# Altium PCB 2015_CNC.PcbDoc
Units mil, origin at the board's own origin, x right, y up, seen from the top; angles counter-clockwise.
Board outline 2520 x 3950 mil, 4 copper layers (1-TOP, 2-SIGNAL, 3-GND, 4-BOT), stack 68 mil thick; 85 components, 74 nets, 344 pads, 102 vias.
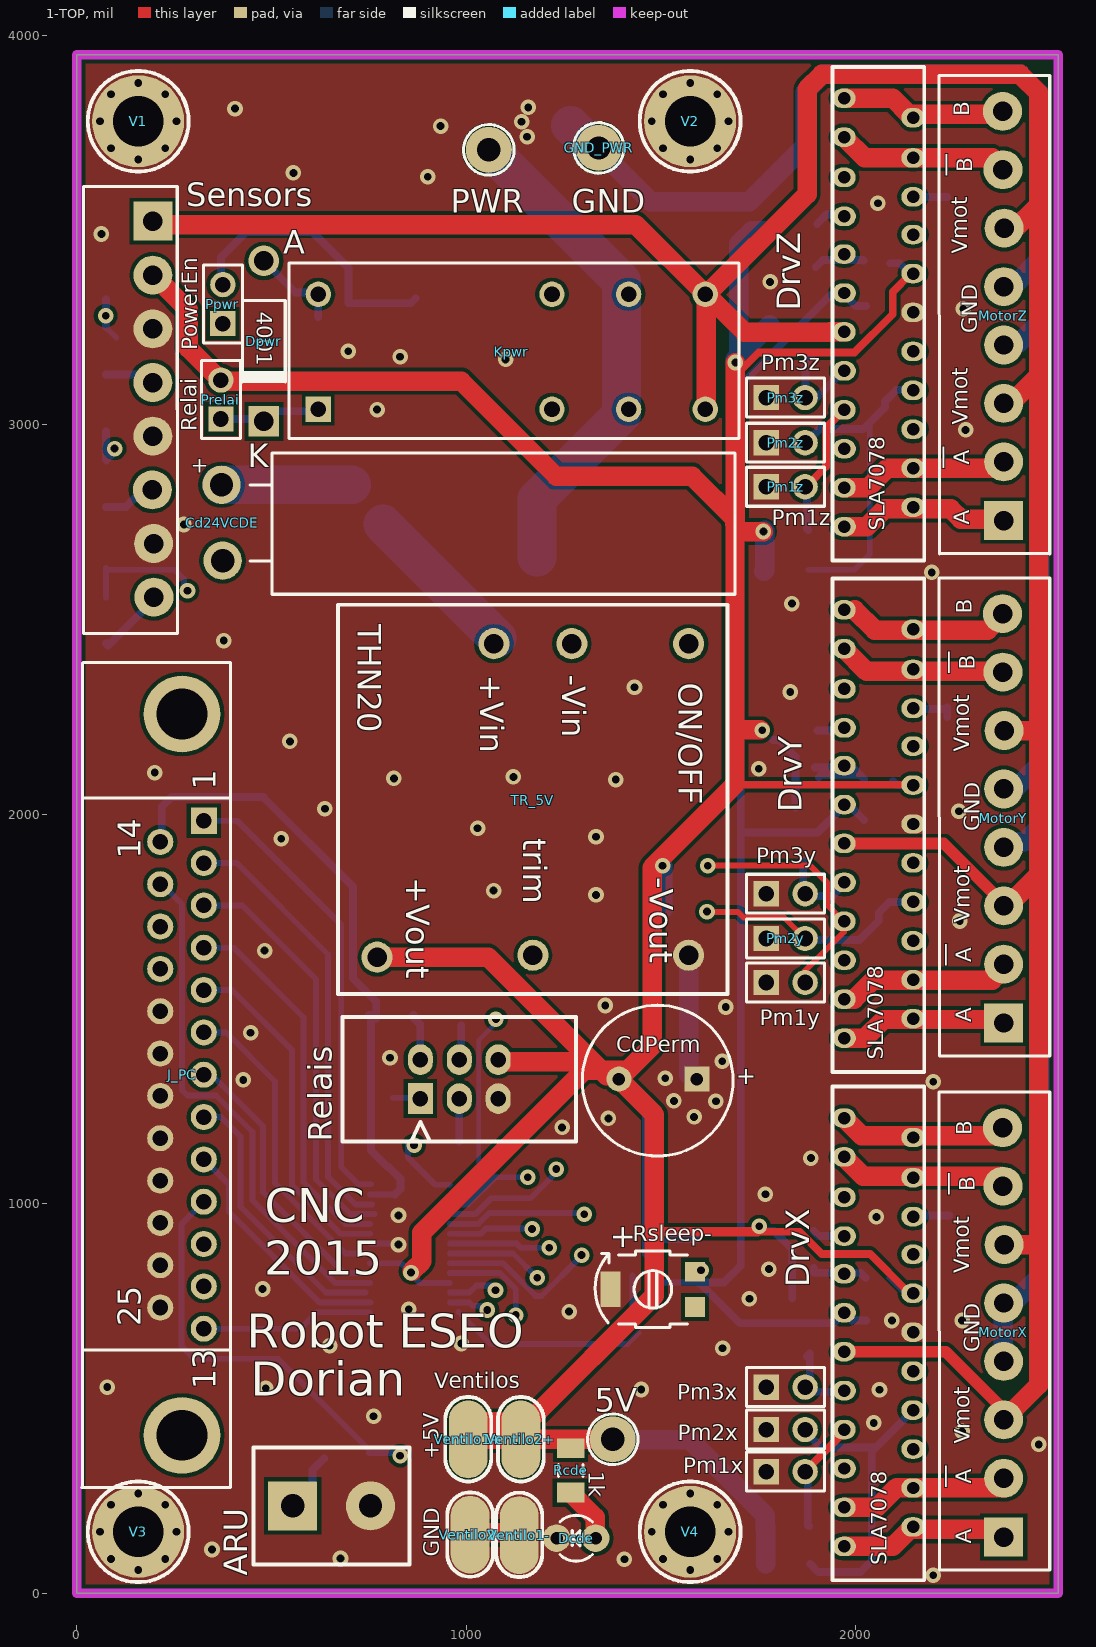
[diagram p0: 1-TOP view]
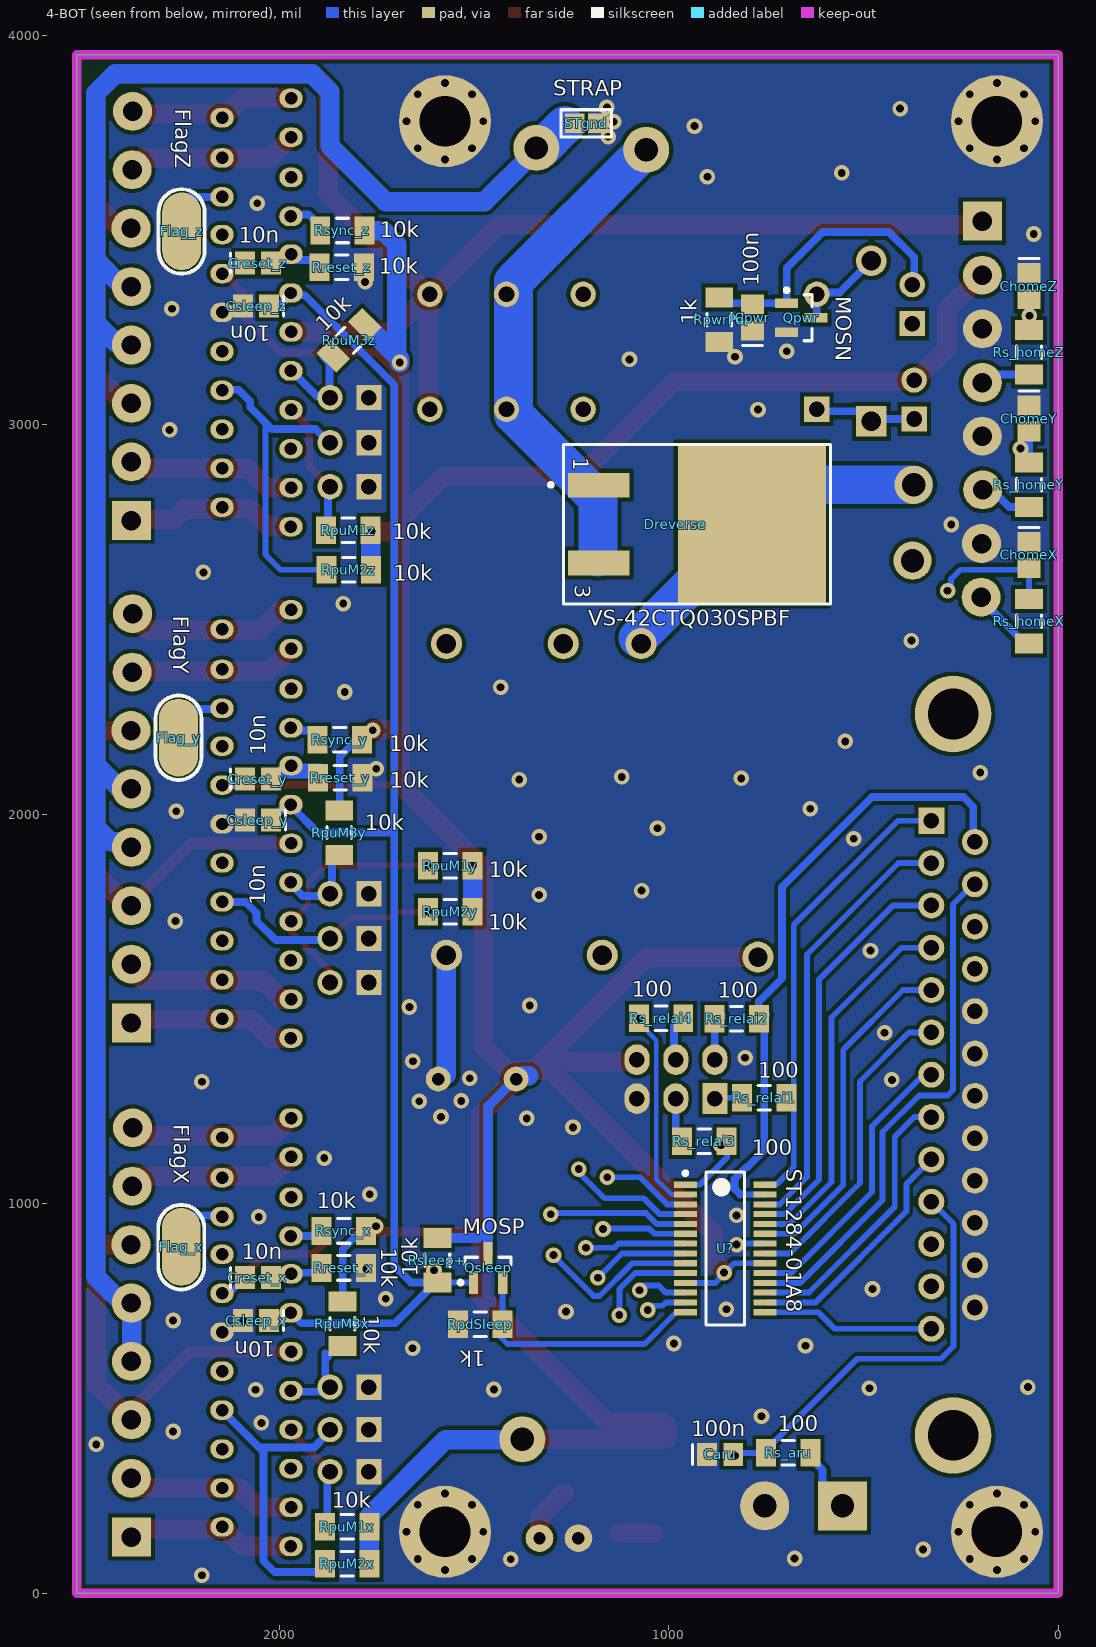
[diagram p1: 4-BOT view, seen from below]
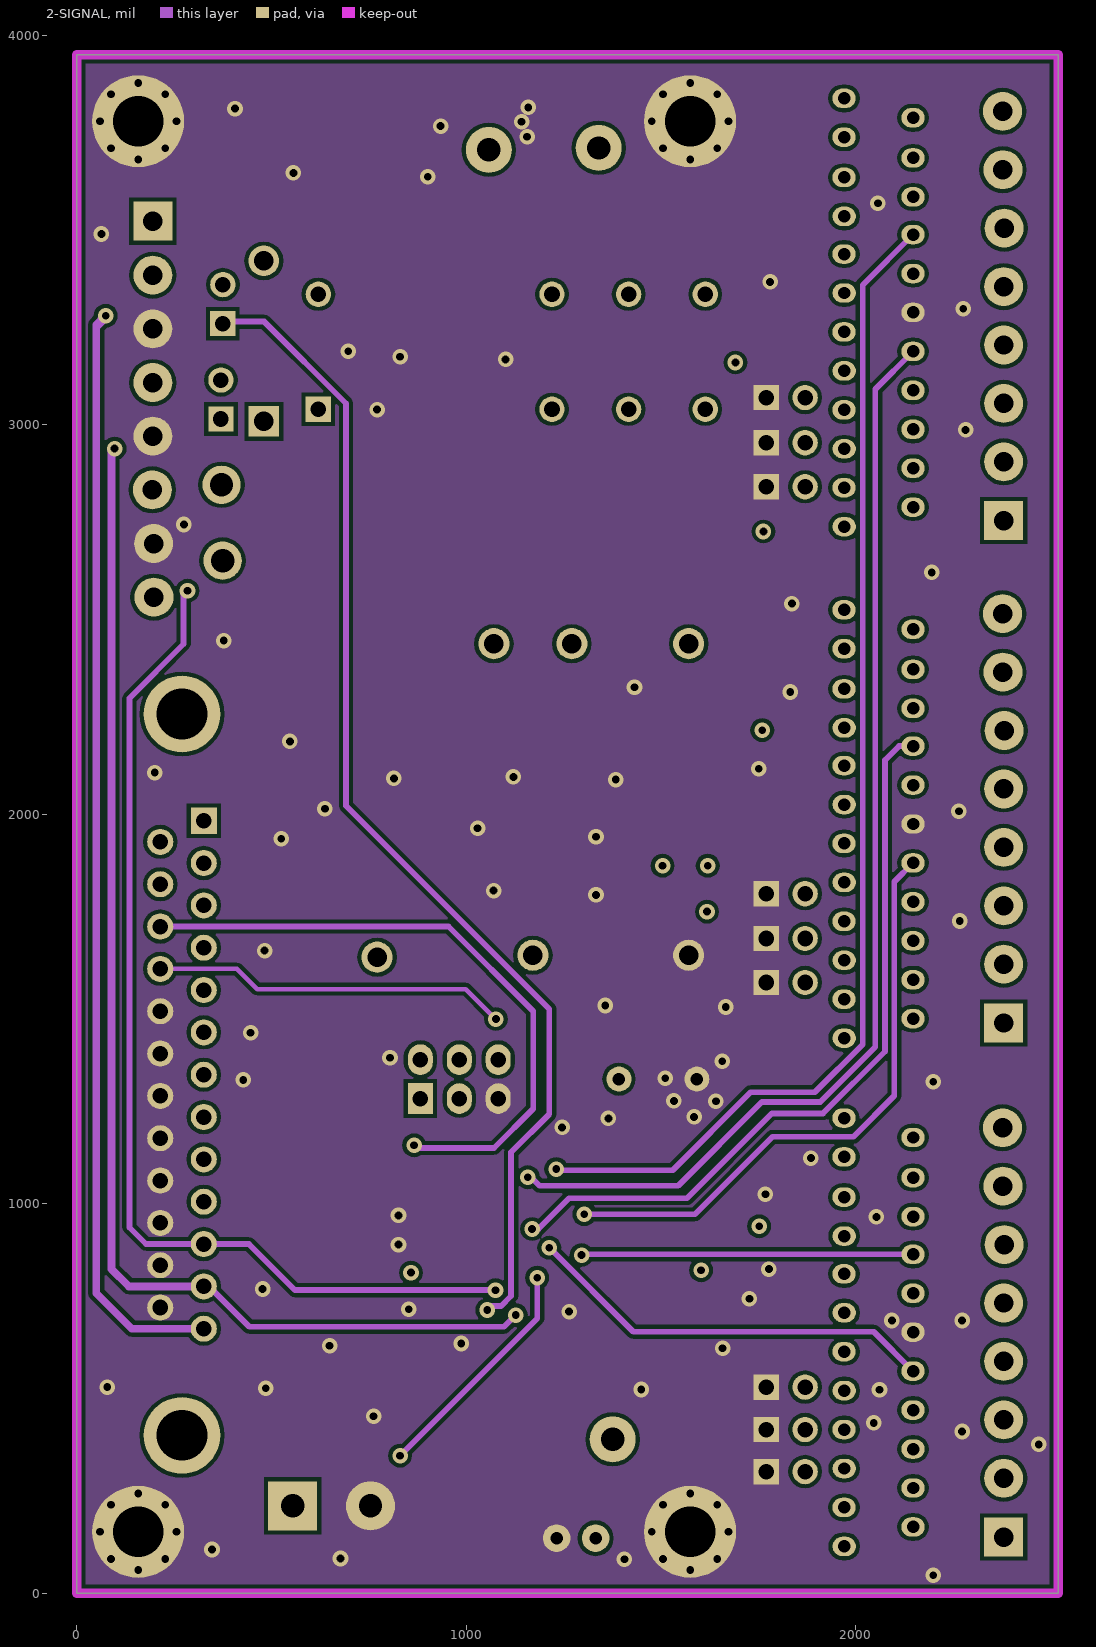
[diagram p2: 2-SIGNAL]
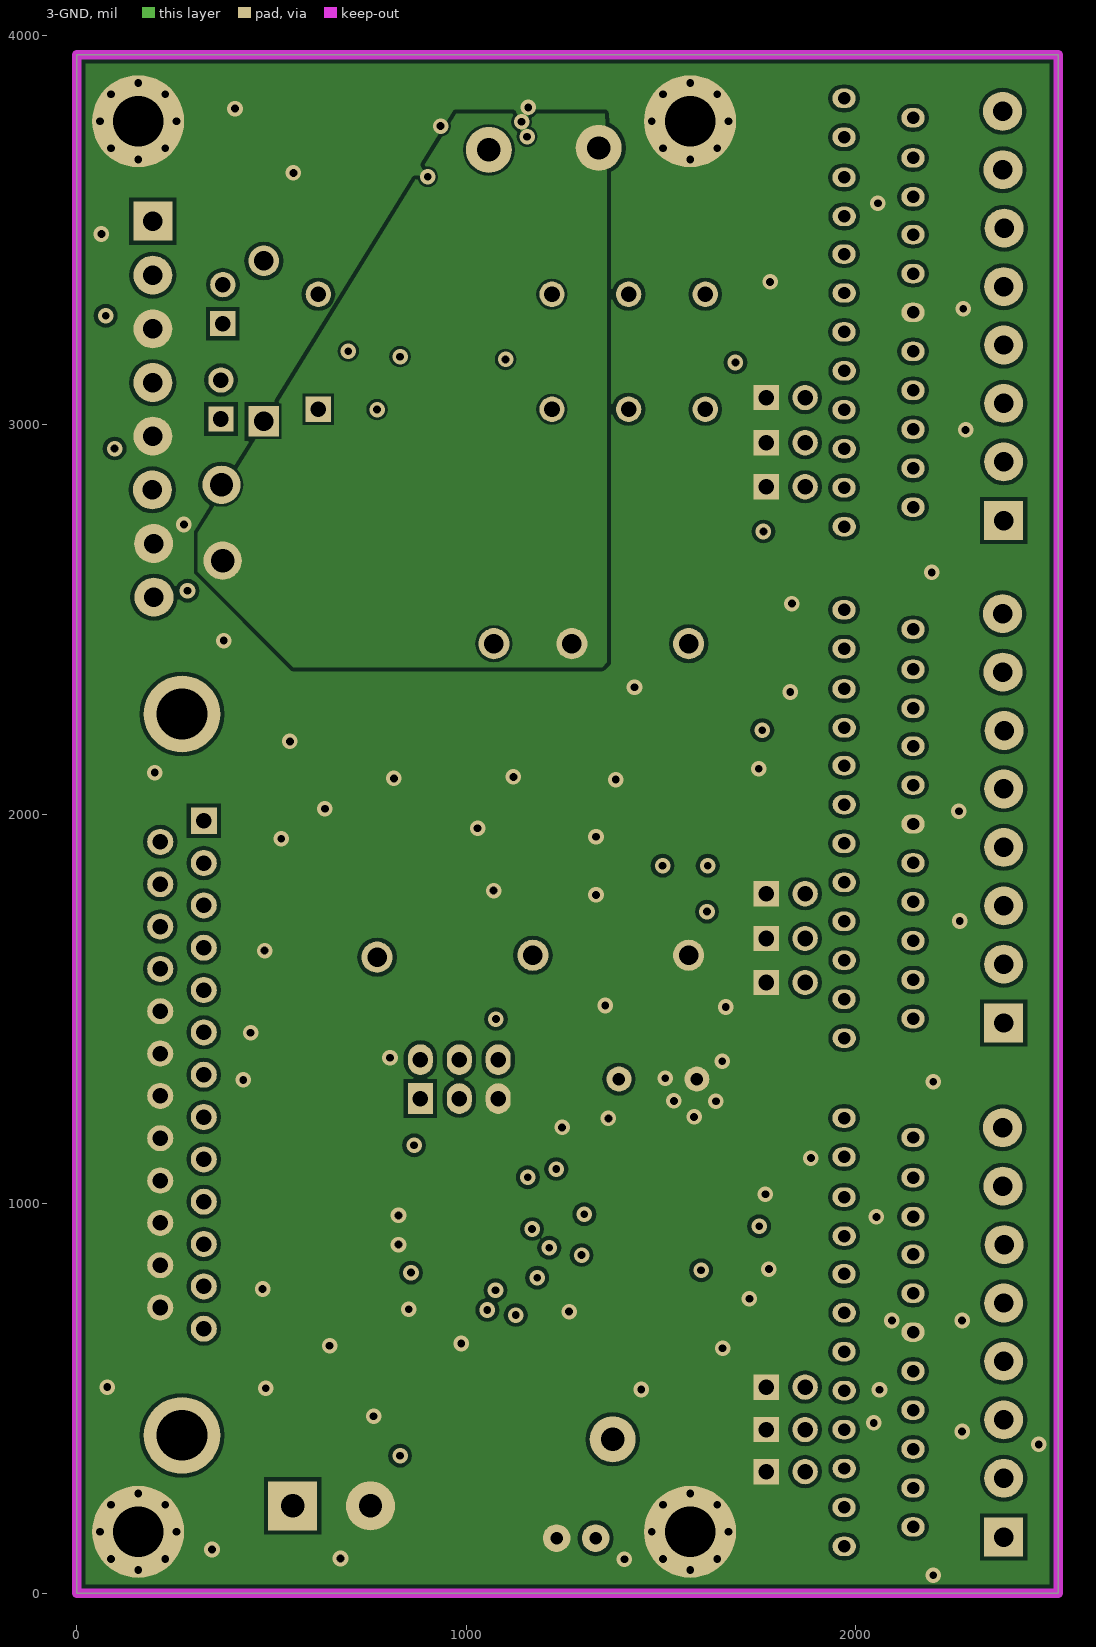
[diagram p3: 3-GND]
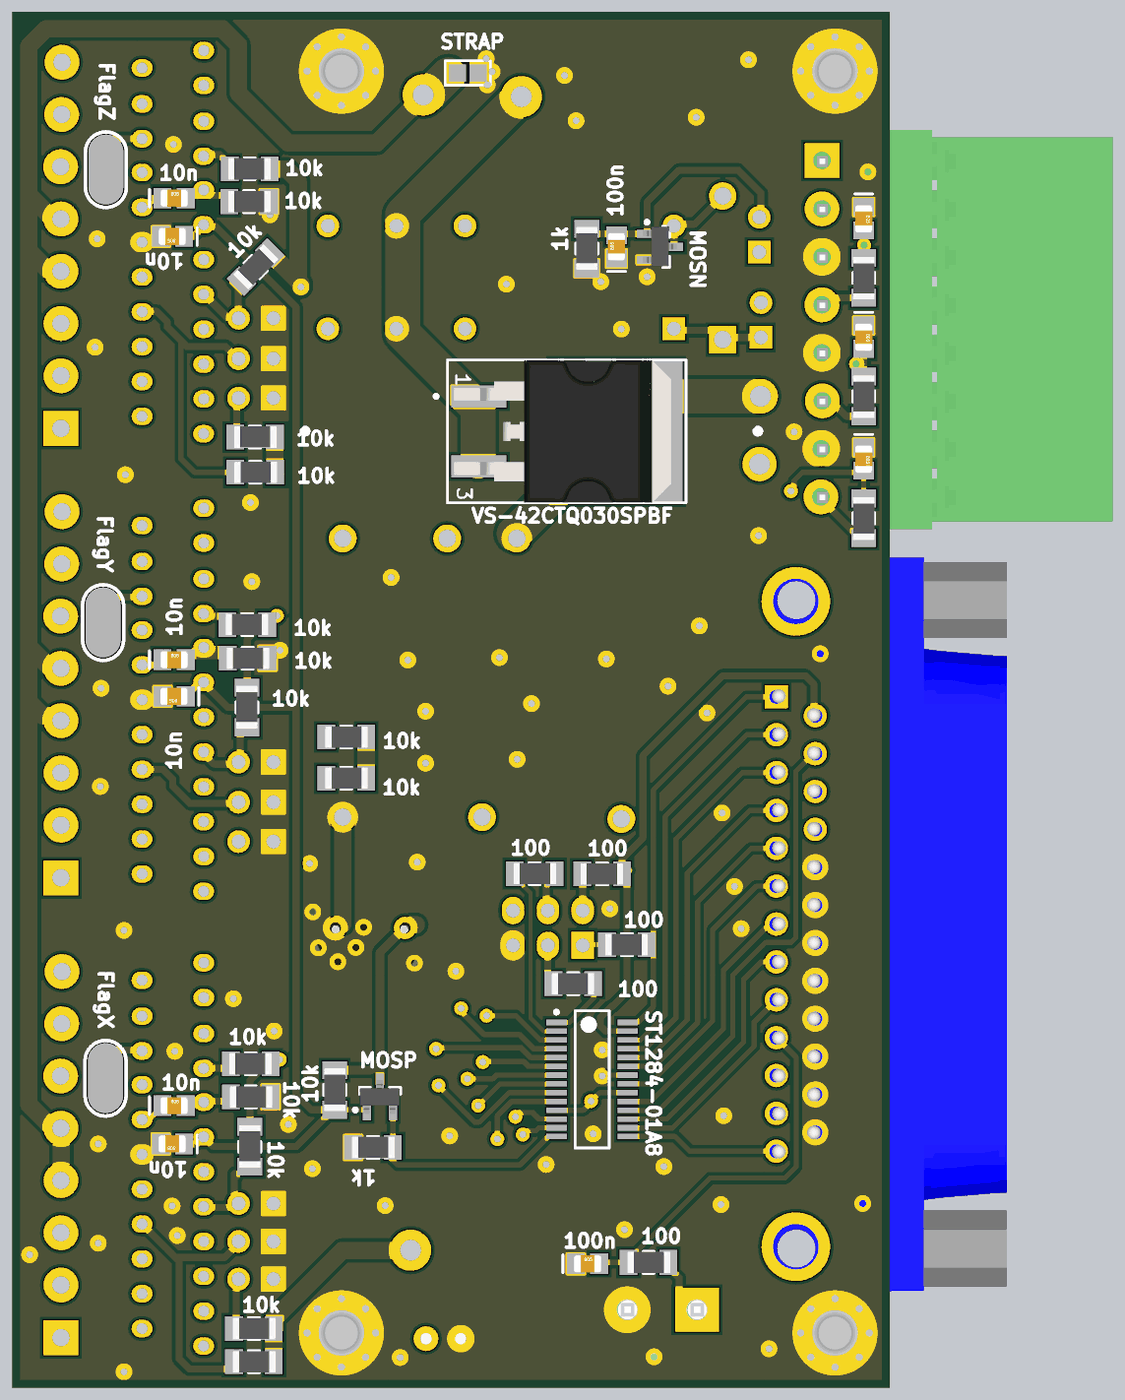
[diagram p4: 3D render of the assembled board from below, using the file's embedded part models]

## Layer stack, top to bottom
Top Solder: solder mask 0.4, Solder Resist, Dk 3.5
1-TOP: signal copper 1.4
Dielectric1: core 20.8, FR-4, Dk 4.8
2-SIGNAL: signal copper 1.4
Dielectric2: prepreg 20.8, FR-4, Dk 4.8
3-GND: signal copper 1.4
Dielectric3: core 20.8, FR-4, Dk 4.8
4-BOT: signal copper 1.4
Bottom Solder: solder mask 0.4, Solder Resist, Dk 3.5

## Board outline
0,0 0,3950 2520,3950 2520,0

## Design rules (kind name [scope] priority, off if disabled: settings)
Clearance Clearance_1 [InNamedPolygon('2-GND') Or  InNamedPolygon('3-GND') Or  InNamedPolygon('1-GND') Or  InNamedPolygon('4-GND')] p1: gap=10
Clearance [All] p2: gap=7
FabricationTestpoint [(IsPad And (OnTopLayer Or OnBottomLayer))] p1: side=3 testpointundercomponent=TRUE minsize=40 maxsize=100 preferedsize=60 minholesize=0 maxholesize=40 preferedholesize=32 testpointgrid=1 allowsidetop=TRUE allowsidebottom=TRUE usegrid=TRUE gridtolerance=0.01
HoleSize [All] p1: absolutevalues=TRUE maxlimit=200 minlimit=1 maxpercent=80.000 minpercent=20.000
PlaneConnect [All] p1: planeconnectstyle=Direct reliefexpansion=20 reliefentries=4 reliefconductorwidth=10 reliefairgap=10
PolygonConnect [All] p1: connectstyle=Direct reliefconductorwidth=10 reliefentries=4 polygonreliefangle="90 Angle" airgapwidth=10
RoomDefinition 2015_CNC [InComponentClass('2015_CNC')] p1: confinementstyle=ConfineIn formatcopy=TRUE lockcomponents=FALSE outline 6845,-1450 6315,-1450 6315,-900 6845,-900
RoutingVias [All] p1: holewidth=28 width=50 viastyle="Through Hole" minholewidth=28 minwidth=50 maxholewidth=28 maxwidth=50
SilkToSolderMaskClearance SilkscreenOverComponentPads [IsPad] p1: minsilkscreentomaskgap=10 clearancetoexposedcopper=TRUE
SolderMaskExpansion [All] p1: expansion=4
Width [All] p1: maxlimit=300 minlimit=10 preferedwidth=20
25 further rules are at their usual default settings.

## Components (designator, comment, footprint, x,y, rotation, side; value= is the part's Value field where it differs from the comment)
5V "Name" "Point Test_D3_P1.6mm" 1376,395 r270 top
ARU "BORNIER2" BORNIER2 554,224 r0 top
Caru "CMS_0805" C0805_N 868,356 r180 bottom
Cd24VCDE "1000uF" RESISTANCE_5W 375,2750 r0 top
CdPerm "100uF" CONDENSATEUR_POLARISE_ELECTROLYTIQUE_RADIAL_5.08/8.9 1592,1320 r180 top
ChomeX "CMS_0805" C0805_N 75,2666 r270 bottom
ChomeY "CMS_0805" C0805_N 75,3016 r270 bottom
ChomeZ "CMS_0805" C0805_N 75,3356 r270 bottom
Cpwr "CMS_0805" C0805_N 785,3275 r90 bottom
Creset_x "CMS_0805" C0805_N 2055,810 r180 bottom
Creset_y "CMS_0805" C0805_N 2055,2090 r180 bottom
Creset_z "CMS_0805" C0805_N 2055,3415 r180 bottom
Csleep_x "CMS_0805" C0805_N 2060,700 r0 bottom
Csleep_y "CMS_0805" C0805_N 2055,1985 r0 bottom
Csleep_z "CMS_0805" C0805_N 2060,3305 r0 bottom
Dcde "LED" LED_3mm 1282,141 r90 top
Dpwr "Diode 1N4001" DO-41 480,3215 r270 top
Dreverse "VS-42CTQ030SPBF" "D2Pak (123)" 1180,2845 r270 bottom
DrvX "SLA7078" SLA23 1970,120 r90 top
DrvY "SLA7078" SLA23 1970,1425 r90 top
DrvZ "SLA7078" SLA23 1970,2738.49 r90 top
Flag_x "Pad_CMS" PAD_CMS_5.08x2.54 2252,889 r270 bottom
Flag_y "Pad_CMS" PAD_CMS_5.08x2.54 2259,2197 r270 bottom
Flag_z "Pad_CMS" PAD_CMS_5.08x2.54 2251,3497 r270 bottom
GND_PWR "Name" "Point Test_D3_P1.6mm" 1340,3711 r0 top
J_PC "SUBD25_MALE_COUDE" SUBD25_M_C 270,405 r90 top
Kpwr "Relay-SPST_2pins_par_sorties" RELAY_TECONNECTIVITY 620,3040 r0 top
MotorX "BORNIER_8V_3.81MM" BORNIER_8V_3.81MM 2380,145 r90 top
MotorY "BORNIER_8V_3.81MM" BORNIER_8V_3.81MM 2380,1465 r90 top
MotorZ "BORNIER_8V_3.81MM" BORNIER_8V_3.81MM 2380,2755 r90 top
Pm1x "Jumper SIP 2.54" HDR1X2 1770,312 r0 top
Pm1y "Jumper SIP 2.54" HDR1X2 1770,1568 r0 top
Pm1z "Jumper SIP 2.54" HDR1X2 1770,2841 r0 top
Pm2x "Jumper SIP 2.54" HDR1X2 1770,420 r0 top
Pm2y "Jumper SIP 2.54" HDR1X2 1770,1681 r0 top
Pm2z "Jumper SIP 2.54" HDR1X2 1770,2954 r0 top
Pm3x "Jumper SIP 2.54" HDR1X2 1770,529 r0 top
Pm3y "Jumper SIP 2.54" HDR1X2 1770,1796 r0 top
Pm3z "Jumper SIP 2.54" HDR1X2 1770,3070 r0 top
Ppwr "Jumper SIP 2.54" HDR1X2 375,3260 r90 top
Prelai "Jumper SIP 2.54" HDR1X2 370,3015 r90 top
PWR "Name" "Point Test_D3_P1.6mm" 1058,3706 r270 top
Qpwr "MOSN" SOT23-3N 660,3275 r180 bottom
Qsleep "MOSP" SOT23-3N 1464,835 r90 bottom
Rcde "1k" R1206_N 1268,315 r270 top
Relais "BARRETTE_6 CONTACTS_1 RANGEE_MALE_DROITE" "HE10/6_MAL_DROIT_BAS PROFIL" 882,1370 r0 top
RpdSleep "RESISTANCE_CMS_1206" R1206_N 1484,690 r180 bottom
RpuM1x "RESISTANCE_CMS_1206" R1206_N 1826,170 r180 bottom
RpuM1y "RESISTANCE_CMS_1206" R1206_N 1561,1868 r180 bottom
RpuM1z "RESISTANCE_CMS_1206" R1206_N 1823,2729 r180 bottom
RpuM2x "RESISTANCE_CMS_1206" R1206_N 1826,75 r180 bottom
RpuM2y "RESISTANCE_CMS_1206" R1206_N 1561,1750 r180 bottom
RpuM2z "RESISTANCE_CMS_1206" R1206_N 1822,2628 r180 bottom
RpuM3x "RESISTANCE_CMS_1206" R1206_N 1838,692 r90 bottom
RpuM3y "RESISTANCE_CMS_1206" R1206_N 1846,1953 r90 bottom
RpuM3z "RESISTANCE_CMS_1206" R1206_N 1821,3217 r135 bottom
RpwrPd "RESISTANCE_CMS_1206" R1206_N 870,3270 r90 bottom
Rreset_x "RESISTANCE_CMS_1206" R1206_N 1835,835 r180 bottom
Rreset_y "RESISTANCE_CMS_1206" R1206_N 1844,2094 r180 bottom
Rreset_z "RESISTANCE_CMS_1206" R1206_N 1840,3405 r180 bottom
Rs_aru "RESISTANCE_CMS_1206" R1206_N 693,360 r180 bottom
Rs_homeX "RESISTANCE_CMS_1206" R1206_N 75,2496 r270 bottom
Rs_homeY "RESISTANCE_CMS_1206" R1206_N 75,2846 r270 bottom
Rs_homeZ "RESISTANCE_CMS_1206" R1206_N 75,3186 r270 bottom
Rs_relai1 "RESISTANCE_CMS_1206" R1206_N 755,1272 r0 bottom
Rs_relai2 "RESISTANCE_CMS_1206" R1206_N 826,1475 r0 bottom
Rs_relai3 "RESISTANCE_CMS_1206" R1206_N 909,1160 r0 bottom
Rs_relai4 "RESISTANCE_CMS_1206" R1206_N 1020,1476 r180 bottom
Rsleep+ "RESISTANCE_CMS_1206" R1206_N 1594,855 r90 bottom
Rsleep- "1k" "POT_3150W_CMS a modifier" 1479,780 r90 top
Rsync_x "RESISTANCE_CMS_1206" R1206_N 1835,930 r0 bottom
Rsync_y "RESISTANCE_CMS_1206" R1206_N 1845,2191 r0 bottom
Rsync_z "RESISTANCE_CMS_1206" R1206_N 1838,3499 r0 bottom
Sensors "BORNIER_8V_3.5MM" BORNIER_8V_3.5MM_COUDE 195,3522 r270 top
STgnd "Goutte Strap_2" "Goutte Strap_2 Pads_Clearance 0.254mm" 1242,3774 r180 bottom
TR_5V "TRACO THN 20-4811Wi" TRACO_THN20 1671,2538 r270 top
U? "ST1284-01A8" QSOP28 855,885 r180 bottom
V1 "Pad_M3" M3x6mm 157.48,3779.53 r270 top
V2 "Pad_M3" M3x6mm 1574.8,3779.53 r270 top
V3 "Pad_M3" M3x6mm 157.48,157.48 r270 top
V4 "Pad_M3" M3x6mm 1574.8,157.48 r270 top
Ventilo1+ "Pad_CMS" PAD_CMS_5.08x2.54 1005,395 r90 top
Ventilo1- "Pad_CMS" PAD_CMS_5.08x2.54 1136,149 r90 top
Ventilo2+ "Pad_CMS" PAD_CMS_5.08x2.54 1140,395 r90 top
Ventilo2- "Pad_CMS" PAD_CMS_5.08x2.54 1010,150 r90 top

## Footprints (in the part's own frame and the unit in brackets; to place one, negate y for a bottom-side part, rotate by r counter-clockwise, add the part's x,y. Pads: shape width x height; smd on the part's side, far side on the other; paste and mask are expansions set on the pad)
BORNIER2 [mm] "Connector; Header; 2 Position; screw terminal blocks, Pin Spacing=5.08mm"
  rect 3.2x3.2 hole 1.524: 1(0,0)
  round 3.2 hole 1.524: 2(5.08,0)
  silkscreen extent -2.54,-3.81 7.62,3.81, body extent -3.57,-4.8 8.59,3.8, height 12
BORNIER_8V_3.5MM_COUDE [mm]
  rect 2.54x2.54 hole 1.27: 1(-0.025,0)
  round 2.54 hole 1.27: 2(3.5,0) 3(7,0) 4(10.5,0) 5(14,0) 6(17.5,-0.025) 7(21,0.051) 8(24.5,0.076)
  silkscreen extent -2.29,-4.52 26.87,1.61, body extent -2.26,-21.19 26.84,1.17, height 8.2
BORNIER_8V_3.81MM [mil]
  rect 100x100 hole 50: 1(-1,0)
  round 100 hole 50: 2(150,0) 3(300,0) 4(450,0) 5(600,0) 6(750,-1) 7(900,2) 8(1050,3)
  silkscreen extent -86,-118 1142,166
C0805_N [mm] "Chip Capacitor, Body 2.0x1.3mm, IPC Medium Density"
  rect 1.3x1.5 smd: 1(-0.85,0) 2(0.85,0)
  silkscreen extent -1.8,-0.65 -1.8,0.65, body extent -0.99,-0.63 1.01,0.63, height 0.8
CONDENSATEUR_POLARISE_ELECTROLYTIQUE_RADIAL_5.08/8.9 [mil] "CONDENSATEUR_POLARISE_ELECTROLYTIQUE_RADIAL ; DIAMETRE : 8.9mm ; ESPACEMENT BROCHES : 5.08mm"
  rect 64x64 / inner round 64 / far side round 64 hole 32: 1(0,0)
  round 64 hole 32: 2(200,0)
  silkscreen extent -93,-190 294,197, body extent -93,-188 291,196, height 485
"D2Pak (123)" [mm] "D2-PAK; 3 Leads (1 Cropped); Body 15.2 (inc. leads) x 10.9 mm (LxW max)"
  rect 1.61x4 smd: 1(0,0) 3(5.08,0)
  rect 10.49x9.68 smd: 2(2.54,10)
  silkscreen extent -2.67,-3.25 7.75,15.11, body extent -2.66,-1.8 7.74,14.05, height 4.6
DO-41 [mm] "Diode, Axial; Body 5.2 x 2.7 mm (LxDia. max), Lead Dia. 0.86 mm (max)"
  round 2 hole 1.27: 1(-5.23,0)
  rect 2x2 hole 1.27: 2(5.23,0)
  silkscreen extent -2.65,-1.41 2.75,1.4
"Goutte Strap_2 Pads_Clearance 0.254mm" [mil] "Goutte Strap_2 Pads_Clearance 0.254mm"
  rect 50x50 smd mask+7.87: 1(0,0) 2(60,0)
  silkscreen extent -35,-35 95,35
HDR1X2 [mil] "Connector; Header; 2 Position"
  rect 65x65 hole 40: 1(0,0)
  round 65 hole 40: 2(100,0)
  silkscreen extent -50,-50 150,50
"HE10/6_MAL_DROIT_BAS PROFIL" [mm] "Connector; HE10; 6 Position; Male; Right Low Profile; Pin Spacing=2.54mm"
  rect 1.63x2 hole 1.016: 1(0,-2.54)
  oval 1.63x2 hole 1.016: 2(0,0) 3(2.54,-2.54) 4(2.54,0) 5(5.08,-2.54) 6(5.08,0)
  silkscreen extent -5.08,-5.33 10.16,2.79
LED_3mm [mm] "LED 3mm; 2 Leads"
  round 1.8 hole 0.813: 1(0,-1.27) 2(0,1.27)
  silkscreen extent -1.5,-1.06 1.5,1.06, body extent -1.64,-1.65 1.65,1.65, height 5.51
M3x6mm [mm] "Vis M3 X 6mm _TORX_Tête 6mm"
  round 0.8 hole 0.508: 1(-2.5,0) 1(-1.768,1.768) 1(-1.768,-1.768) 1(0,2.5) 1(0,-2.5) 1(1.768,1.768) 1(1.768,-1.768) 1(2.5,0)
  round 6 hole 3.302: 1(0,0)
  silkscreen extent -3.28,-3.29 3.28,3.29, body extent -2.84,-2.85 2.86,2.85, height 1.67
PAD_CMS_5.08x2.54 [mil] "Pad pour souder un fil"
  oval 200x100 smd paste+0.2: 1(0,0)
  silkscreen extent -108,-59 109,59, body extent -85,-30 84,30, height 10
"Point Test_D3_P1.6mm" [mm] "Test point for PCB_Hole 1.6mm"
  round 3 hole 1.524: 1(0,0)
  silkscreen extent -1.65,-1.65 1.65,1.65
"POT_3150W_CMS a modifier" [mm] "Trimmer CMS 3150W Tyco"
  rect 1.3x1.3 smd: 1(-1.15,-2.75) 3(1.15,-2.75)
  rect 2.3x1.3 smd: 2(0,2.75)
  silkscreen extent -2.5,-2.25 2.5,3.76, body extent -2.46,-3.1 2.54,3.1, height 2.55
QSOP28 [mm] "SOP, 28-Leads, Body 9,89x3,89mm, Pitch 0,64mm, IPC Medium Density"
  rect 1.5x0.4 smd: 1(-2.6,4.16) 2(-2.6,3.52) 3(-2.6,2.88) 4(-2.6,2.24) 5(-2.6,1.6) 6(-2.6,0.96) 7(-2.6,0.32) 8(-2.6,-0.32) 9(-2.6,-0.96) 10(-2.6,-1.6) 11(-2.6,-2.24) 12(-2.6,-2.88) 13(-2.6,-3.52) 14(-2.6,-4.16) 15(2.6,-4.16) 16(2.6,-3.52) 17(2.6,-2.88) 18(2.6,-2.24) 19(2.6,-1.6) 20(2.6,-0.96) 21(2.6,-0.32) 22(2.6,0.32) 23(2.6,0.96) 24(2.6,1.6) 25(2.6,2.24) 26(2.6,2.88) 27(2.6,3.52) 28(2.6,4.16)
  silkscreen extent -2.73,-5 1.25,5.03, body extent -2,-5 2,5, height 1.75
R1206_N [mm] "Chip Resistor, Body 3.2x1.6mm, IPC Medium Density"
  rect 1.3x1.8 smd: 1(-1.45,0) 2(1.45,0)
  silkscreen extent -0.4,-0.8 0.4,0.8, body extent -1.68,-0.87 1.68,0.87, height 0.71
RELAY_TECONNECTIVITY [mil] "OZ-SS-105LM1,200"
  rect 65x65 hole 40: 1(0,0)
  round 65 hole 40: 2(600,0) 3(796.85,0) 4(993.7,0) 5(993.7,295.28) 6(796.85,295.28) 7(600,295.28) 8(0,295.28)
  silkscreen extent -75,-75 1080,375
RESISTANCE_5W [mm] "RESISTANCE 5W ; DIAMETRE : 8.5mm ; LONGUEUR : 26mm ; PAS : 2mm"
  round 2.5 hole 1.524: 1(-0.02,-2.505) 2(-0.09,2.441)
  silkscreen extent 1.77,-4.7 33.4,4.5, body extent -0.3,-4.45 33.52,4.25, height 9.35
SLA23 [mil]
  oval 50x60 hole 32: 1(0,-0.39) 2(50,-177.17) 3(100,0) 4(150,-177.17) 5(200,-0.39) 6(250,-177.17) 7(300,0) 8(350,-177.17) 9(400,-0.39) 10(450,-177.17) 11(500,0) 12(550,-177.17) 13(600,-0.39) 14(650,-177.17) 15(700,0) 16(750,-177.17) 17(796.85,-0.39) 18(846.85,-177.17) 19(896.85,0) 20(946.85,-177.17) 21(1000,0) 22(1050,-177.17) 23(1100,0)
  silkscreen extent -87,-206 1181,30
SOT23-3N [mm] "SOT23, 3-Leads, Body 2.9x1.3mm, Pitch 0.95mm, Lead Span 2.5mm, IPC Medium Density"
  rect 1.5x0.6 smd: 1(-0.95,0.95) 2(-0.95,-0.95) 3(0.95,0)
  silkscreen extent -1.07,-1.5 0.7,1.92, body extent -1.24,-1.5 1.23,1.5, height 1.1
SUBD25_M_C [mm] "SUBD ; 25 CONTACTS ; MALE ; COUDE ; PAS = 2.77 mm / 2.8 mm"
  rect 1.7x1.7 hole 1.016: 1(40.092,-1.42)
  round 1.7 hole 1.016: 2(37.331,-1.42) 3(34.57,-1.42) 4(31.809,-1.42) 5(29.048,-1.42) 6(26.287,-1.42) 7(23.526,-1.42) 8(20.765,-1.42) 9(18.004,-1.42) 10(15.243,-1.42) 11(12.482,-1.42) 12(9.721,-1.42) 13(6.96,-1.42) 14(38.711,1.42) 15(35.95,1.42) 16(33.189,1.42) 17(30.428,1.42) 18(27.667,1.42) 19(24.906,1.42) 20(22.145,1.42) 21(19.384,1.42) 22(16.623,1.42) 23(13.862,1.42) 24(11.101,1.42) 25(8.34,1.42)
  round 5 hole 3.302: FIX1(0,0) FIX2(47.052,0)
  silkscreen extent -3.39,-3.16 50.4,6.55, body extent -3.23,-3 50.23,15.4, height 12.7
TRACO_THN20 [mil] "THN20"
  round 80 hole 50: 1(100,-600) 2(100,-400) 3(905,-900) 4(900,-500) 5(900,-100) 6(100,-100)
  silkscreen extent 0,-1000 1000,0, body extent -2,-1001 1001,0, height 390

## Part data
5V GND_PWR PWR: library part "Point Test", "Point test"
ARU: "Terminal blocks, 2 pins, pitch=5mm"
Caru ChomeX ChomeY ChomeZ Cpwr Creset_x Creset_y Creset_z Csleep_x Csleep_y Csleep_z: library part CONDENSATEUR_CMS_CER_0805, "CONDENSATEUR CMS CERAMIQUE 0805"
Cd24VCDE CdPerm: library part "Condensateur Polarise Traversant", "Polarized Capacitor"
Dcde: "Typical LED"
Dpwr: "1 Amp General Purpose Rectifier"
Dreverse: library part "Diode Shottky double BAT54C", "DIODE SCHOTTKY DOUBLE"
Flag_x Flag_y Flag_z Ventilo1+ Ventilo1- Ventilo2+ Ventilo2-: "Pad pour souder un fil"
J_PC: "CONNECTEUR SUBD25 MALE COUDE"
Kpwr: "OZ-SS-105LM1,200 - Single-Pole Single-Throw Relay"
Pm1x Pm1y Pm1z Pm2x Pm2y Pm2z Pm3x Pm3y Pm3z Ppwr Prelai: library part "Jumper SIP2.54", "Jumper SIP2.54"
Qpwr: library part "Transistor MOSFET-N", "N-Channel MOSFET"
Qsleep: library part "Transistor MOSFET-P", "P-Channel MOSFET"
Rcde: library part Resistor, "Resistor"
Relais: "BARRETTE 6 CONTACTS 1 RANGEE MALE DROITE"
RpdSleep RpuM1x RpuM1y RpuM1z RpuM2x RpuM2y RpuM2z RpuM3x RpuM3y RpuM3z RpwrPd Rreset_x Rreset_y Rreset_z Rs_aru Rs_homeX Rs_homeY Rs_homeZ Rs_relai1 Rs_relai2 Rs_relai3 Rs_relai4 Rsleep+ Rsync_x Rsync_y Rsync_z: library part RESISTANCE_CMS_0805, "RESISTANCE CMS 1206"
Rsleep-: library part "Resistor Ajustable", "Resistor Ajustable"
TR_5V: "Traco 20W 24V to 5V*4A"
U?: "Parallel port single termination network with ±15 kV ESD protection"
V1 V2 V3 V4: library part "Vis M3 X 6mm _TORX_Tête 6mm", "Vis M3 X 6mm _TORX_Tête 6mm"

## Via types
v1: diameter 40, hole 20, 1-TOP to 4-BOT, 102 vias

## Nets (pads, with @x,y where several pads share a name; then routed paths per layer and width w, separated by ;. In a path a pad name is that pad's centre, name@x,y a point inside that pad or via, vN(x,y) a via of type N, cw(c..) or ccw(c..) an arc to the next point about the centre after c; other vN are vias at no path point)
5V: 5V.1 CdPerm.2 Creset_x.1 Creset_y.1 Creset_z.1 DrvX.14 DrvY.14 DrvZ.14 Prelai.2 Qsleep.3 Rcde.1 Relais.6 RpuM1x.2 RpuM1y.2 RpuM1z.2 RpuM2x.2 RpuM2y.2 RpuM2z.2 RpuM3x.2 RpuM3y.2 RpuM3z.2 Rsleep+.2 Rsync_x.1 Rsync_y.1 Rsync_z.1 Sensors.2 TR_5V.3 U?.11 U?.20 Ventilo1+.1 Ventilo2+.1 | length 11770.3
  1-TOP w20: 1690,2076 DrvY.14@2135,2076 ; 1691,3126 1751,3186 1997,3186 2095,3284 2095,3341 DrvZ.14@2139,3385 ; v1@1748,928 1856,928 1913,871 2037,871 DrvX.14@2134,774
  1-TOP w25: 1490,928 v1@1748,928
  1-TOP w50: Sensors.2@183,3395 186,3395 286,3295 286,3197 371,3112 987,3112 1231,2868 1580,2868 1691,2757 ; TR_5V.3 1056,1633 1346,1343 ; v1@861,827 886,852 886,926 1303,1343 ; Ventilo1+.1@1005,432 Ventilo1+.1 Ventilo2+.1 5V.1@1325,395 ; Ventilo1+.1@1018,440 1159,440 1483,764 1483,1229 CdPerm.2 1415,1343 ; Relais.6@1085,1365 1281,1365 1303,1343 ; 1360,1329 1346,1343 ; 1689,2746 1690,2747 ; v1(1691,3160) 1691,3126 1691,2757 ; 1695,2728 1697,2726 v1(1763,2726) ; v1@1755,2217 1690,2217 ; 1303,1343 1346,1343 ; 1346,1343 1415,1343 ; 1415,1343 1477,1405 1477,1863 1690,2076 1690,2217 ; 1690,2217 1690,2747 ; 1690,2747 1691,2748 1691,2757
  4-BOT w15: U?.20 832.8,847.2 v1@862,818 ; v1@860,819 860,817 880.19,796.81 U?.11 ; Creset_x.1@2087,810 2127,770 DrvX.14
  4-BOT w20: Rsync_x.1 1790,930 1837,883 RpuM3x.2@1837,758 ; Rsync_y.1 1802,2191 1845,2148 RpuM3y.2@1845,2017 ; Creset_z.1 2113,3415 DrvZ.14@2137,3391 ; Creset_y.1@2096,2085 2106,2075 DrvY.14
  4-BOT w25: CdPerm.2@1396,1318 1464,1250 Qsleep.3 ; 1466,936 1489.91,912.09 Rsleep+.2
  4-BOT w50: 1360,1329 CdPerm.2@1373,1329 ; 5V.1@1372,395 5V.1 1377,394 1573,394 1768,199 RpuM1x.2@1768,165 ; RpuM2y.2@1503.91,1765.09 RpuM2y.2@1503.91,1776 ; v1(1504,1868) 1504,1762 RpuM2y.2@1507,1759 ; v1(1691,3160) 1691,3169 RpuM3z.2@1779.37,3257.37 ; 1699,3182 1699,3464 1733,3498 Rsync_z.1@1779,3498 ; RpuM2z.2@1764,2624 1765.91,2625.91 1765.91,2726 RpuM1z.2 ; RpuM2x.2 RpuM1x.2
  other v1: 858,823 1752,942 1760,2216
ARU_PC: Caru.2 J_PC.10 Rs_aru.1 U?.8 | length 1946.8
  2-SIGNAL w15: v1@824.5,347.5 v1(830,353) 1182,705 v1(1182,810) v1@1182,813
  4-BOT w15: J_PC.10@325.91,987.09 J_PC.10 269,948.21 269,634 301,602 516,602 Rs_aru.1@745,373 ; Rs_aru.1 Caru.2@836,360 ; U?.8 1015.6,872.4 1016,872 1120,872 v1(1182,810)
CDE_RELAI1: J_PC.1 Rs_relai1.1 U?.28 | length 1180.1
  4-BOT w15: J_PC.1 411.57,1983.43 679,1716 679,1094 723,1050 U?.28@755,1050
CDE_RELAI2: J_PC.14 Rs_relai2.1 U?.27 | length 1608.8
  4-BOT w15: U?.27@753,1023.91 816.91,1023.91
  4-BOT w20: J_PC.14@218,1931 218,2019 243,2044 479,2044 709,1814 709,1578.83 768.91,1518.91 Rs_relai2.1 ; Rs_relai2.1@749.91,1485 Rs_relai2.1@759.15,1485 ; Rs_relai2.1@755,1475 755,1137 797,1095 ; 800,1095 831,1064 831,1038 816.91,1023.91
CDE_RELAI3: J_PC.16 Rs_relai3.1 U?.1 | length 1819.4
  2-SIGNAL w15: J_PC.16 954.33,1711.67 1172,1494 1172,1244 1071,1143 v1@864,1143
  4-BOT w15: Rs_relai3.1@850,1154 850,1119 920.22,1048.78 U?.1
  other v1: 866,1150
CDE_RELAI4: J_PC.17 Rs_relai4.1 U?.2 | length 1417
  2-SIGNAL w12: J_PC.17 411.03,1602.97 463,1551 999,1551 v1(1076,1474)
  4-BOT w12: U?.2 992.58,1023.58 1032,1063 1032,1420 Rs_relai4.1@1070,1458
CLKX_INPUT: J_PC.6 U?.21 | length 814.7
  4-BOT w15: J_PC.6 383.08,1439.92 509,1314 509,1053 689.6,872.4 U?.21
CLKX_OUTPUT: DrvX.10 U?.7 | length 1324.1
  2-SIGNAL w15: v1@1214,886 1429,671 2046.17,671 DrvX.10
  4-BOT w15: U?.7 1129.4,897.6 1140,887 v1(1213,887)
CLKY_INPUT: J_PC.4 U?.24 | length 968.5
  4-BOT w15: J_PC.4 402.68,1657.32 582,1478 582,1056 690,948 U?.24@753.4,948
CLKY_OUTPUT: DrvY.10 U?.5 | length 1893.1
  2-SIGNAL w15: v1@1307,973 1587,973 1786,1172 1994,1172 2099,1277 2099,1826.83 DrvY.10
  4-BOT w15: U?.5 1030.99,947.99 1059,976 v1@1303,976
  other v1: 1303,973
CLKZ_INPUT: J_PC.2 U?.26 | length 1129.7
  4-BOT w15: J_PC.2 410.28,1874.72 645,1640 645,1069 716,998 U?.26@758,998
CLKZ_OUTPUT: DrvZ.10 U?.3 | length 3104.7
  2-SIGNAL w15: v1(1158,1068) 1166,1068 1188,1046 1544,1046 1759,1261 1908.89,1261 2050,1402.11 2050,3091.32 DrvZ.10
  4-BOT w15: U?.3 1004.39,998.39 1074,1068 v1(1158,1068)
DIRX_INPUT: J_PC.7 U?.19 | length 724.1
  4-BOT w15: J_PC.7@345.78,1331.22 478,1199 478,1030 686.32,821.68 U?.19@740,821.68
  4-BOT w20: J_PC.7 J_PC.7@345.78,1331.22
DIRX_OUTPUT: DrvX.16 U?.9 | length 1267.8
  2-SIGNAL w15: v1@1295,868 1297,870 DrvX.16
  4-BOT w15: U?.9 995.8,847.2 996,847 1094,847 1178,763 1193,763 v1@1295,865
  other v1: 1296,868
DIRY_INPUT: J_PC.5 U?.23 | length 889.2
  4-BOT w15: J_PC.5 398.38,1548.62 552,1395 552,1048 677,923 752.43,923 U?.23
DIRY_OUTPUT: DrvY.16 U?.6 | length 2149.1
  2-SIGNAL w15: v1@1171,940 1176,935 1185,935 1264,1014 1567,1014 1785,1232 1916,1232 2075,1391 2075,2139 2111,2175 DrvY.16
  4-BOT w15: U?.6 1036.91,922.8 1050.11,936 v1@1171,936
  other v1: 1169,935
DIRZ_INPUT: J_PC.3 U?.25 | length 1068.5
  4-BOT w15: J_PC.3 423.98,1766.02 614,1576 614,1062 702.49,973.51 U?.25@765,973.51
DIRZ_OUTPUT: DrvZ.16 U?.4 | length 3375.9
  2-SIGNAL w15: v1@1227,1082 1231,1086 1530,1086 1730,1286 1895,1286 2018,1409 2018,3359.32 DrvZ.16
  4-BOT w15: U?.4 1023.19,973.19 1064,1014 1165,1014 v1@1230,1079
  other v1: 1231,1089
DRIVER_SLEEP: Qsleep.2 RpdSleep.2 U?.14 | length 633.6
  4-BOT w15: U?.14@980,722 1062,640 1414,640 RpdSleep.2@1442,668 ; RpdSleep.2 1426.91,815.91 Qsleep.2@1427,816
DRIVER_SLEEP_PC: J_PC.9 U?.16 | length 621.3
  4-BOT w15: J_PC.9 390,1049.72 390,980 624,746 U?.16@754,746
GND: ARU.2 Caru.1 CdPerm.1 ChomeX.1 ChomeY.1 ChomeZ.1 Cpwr.1 Csleep_x.2 Csleep_y.2 Csleep_z.2 Dcde.2 DrvX.12 DrvY.12 DrvZ.12 J_PC.18 J_PC.19 J_PC.20 J_PC.21 J_PC.22 J_PC.23 J_PC.24 J_PC.25 Pm1x.1 Pm1y.1 Pm1z.1 Pm2x.1 Pm2y.1 Pm2z.1 Pm3x.1 Pm3y.1 Pm3z.1 Qpwr.2 Relais.5 RpdSleep.1 RpwrPd.1 Rreset_x.2 Rreset_y.2 Rreset_z.2 Rsleep-.2 Sensors.3 Sensors.5 Sensors.7 STgnd.2 TR_5V.5 U?.22 V1.1 V2.1 V3.1 V4.1 Ventilo1-.1 Ventilo2-.1 | length 463.4
  1-TOP w50: Ventilo2-.1@1040,154 1041,155 Ventilo1-.1@1129,155
  4-BOT w15: U?.22 v1@819.6,897.6
  4-BOT w50: CdPerm.1@1571,1331 TR_5V.5
  other v1: 2199,46 1406,87 677,89 347,112 2470,382 2273,415 2046,437 762,454 2061,522 1449,523 485,526 78,529 1658,629 649,635 987,641 2093,700 2273,700 1264,723 852,729 1727,756 477,781 1777,832 826,895 2053,966 826,970 1768,1024 1885,1117 1246,1196 1365,1219 1585,1223 1641,1263 1533,1264 2199,1313 427,1318 1511,1322 1657,1366 804,1375 446,1439 1666,1505 1357,1509 482,1650 2267,1726 1333,1793 1070,1804 525,1937 1333,1942 1029,1964 2265,2008 637,2014 1384,2089 814,2092 1121,2096 200,2107 1751,2117 547,2187 1832,2314 1432,2326 377,2446 1836,2541 2195,2621 275,2744 2282,2987 771,3039 1101,3168 830,3175 697,3189 2276,3298 1780,3367 63,3490 2057,3569 901,3637 556,3647 1156,3740 934,3767 1142,3778 406,3812 1159,3815
GND_PWR: Cd24VCDE.1 GND_PWR.1 MotorX.4 MotorX.5 MotorY.4 MotorY.5 MotorZ.4 MotorZ.5 STgnd.1 TR_5V.2 | length 5202.4
  4-BOT w50: GND_PWR.1@1352,3694 1473,3573 1727,3573 1870,3716 1870,3855 1916,3901 2422,3901 2472,3851 2472,3424 ; MotorX.4@2379,601 2379,720 2472,813 2472,1968 ; MotorY.5@2383,2068 2412,2068 2472,2128 ; MotorZ.4@2386,3209 2418,3209 2472,3263 ; MotorY.4@2391,1929 2433,1929 2472,1968 ; MotorZ.5@2406,3358 2472,3424 ; 2472,1968 2472,2128 ; 2472,2128 2472,3263 ; 2472,3263 2472,3424
  4-BOT w100: 1267,3769 1325,3711 GND_PWR.1@1336,3711
HOMEX: Rs_homeX.2 Sensors.8 | length 161.4
  4-BOT w20: Rs_homeX.2 Rs_homeX.2@77.91,2438.91 ; Rs_homeX.2@79.91,2432.91 Sensors.8@192,2545
HOMEX_PC: ChomeX.2 J_PC.11 Rs_homeX.1 U?.12 | length 3140.6
  2-SIGNAL w15: v1@274,2574 274,2437 135,2298 135,939 177.58,896.42 J_PC.11 441.58,896.42 560,778 1062,778 v1@1073,789
  4-BOT w15: Rs_homeX.1@75,2557 ChomeX.2@75,2628 ; ChomeX.2 ChomeX.2@75,2628 ; v1@278,2574 275,2574 275,2604 251,2628 ChomeX.2@75,2628 ; U?.12 1007.61,771.61 1026,790 v1@1070,790
  other v1: 1075,778 284,2574
HOMEY: Rs_homeY.2 Sensors.6 | length 123.2
  4-BOT w20: Rs_homeY.2 125.91,2788.91 Sensors.6@177,2840
HOMEY_PC: ChomeY.2 J_PC.12 Rs_homeY.1 U?.10 | length 3561
  2-SIGNAL w12: v1@89,2924 v1@105,2940
  2-SIGNAL w15: J_PC.12@340,787 443,684 1097,684 v1(1127,714)
  2-SIGNAL w20: v1@89,2935 89,832 133.28,787.72 J_PC.12
  4-BOT w15: Rs_homeY.1@76,2906 Rs_homeY.1@95,2925 ; U?.10 1085.99,822.01 1127,781 v1@1127,728
  4-BOT w20: Rs_homeY.1@75,2911 ChomeY.2
  other v1: 97,2939
HOMEZ: Rs_homeZ.2 Sensors.4 | length 87.9
  4-BOT w20: Rs_homeZ.2 Sensors.4@162.91,3128.91
HOMEZ_PC: ChomeZ.2 J_PC.13 Rs_homeZ.1 U?.15 | length 3406.6
  2-SIGNAL w20: 50,3251 v1@74,3275 ; v1@71,3278 50,3257 50,770 140.98,679.02 J_PC.13
  4-BOT w15: Rs_homeZ.1@80,3245 Rs_homeZ.1@101,3224 ; J_PC.13@329,679 574,679 616.22,721.22 U?.15
  4-BOT w20: Rs_homeZ.1@75,3251 ChomeZ.2
  other v1: 74,3280
MOTOR_X_A: DrvX.1 DrvX.2 MotorX.1 | length 423.8
  1-TOP w50: DrvX.1 2095,120 2139,164 MotorX.1@2376,164
MOTOR_X_A\: DrvX.3 DrvX.4 MotorX.2 | length 435.1
  1-TOP w50: DrvX.3 2054,220 2105,271 MotorX.2@2384,271
MOTOR_X_B: DrvX.22 DrvX.23 MotorX.8 | length 417.6
  1-TOP w50: DrvX.23 2015,1175 MotorX.8@2369,1175
MOTOR_X_B\: DrvX.20 DrvX.21 MotorX.7 | length 419.3
  1-TOP w50: DrvX.21 2019,1071 MotorX.7@2369,1071
MOTOR_Y_A: DrvY.1 DrvY.2 MotorY.1 | length 429.5
  1-TOP w50: DrvY.1 2024,1425 2072,1473 MotorY.1@2380,1473
MOTOR_Y_A\: DrvY.3 DrvY.4 MotorY.2 | length 455.5
  1-TOP w50: DrvY.3 1996,1525 2045,1574 2350,1574 MotorY.2@2389,1613
MOTOR_Y_B: DrvY.22 DrvY.23 MotorY.8 | length 451.4
  1-TOP w15: DrvY.23 DrvY.23@1997,2525
  1-TOP w50: DrvY.23@1997,2525 2049,2473 2339,2473 MotorY.8@2382,2516
MOTOR_Y_B\: DrvY.20 DrvY.21 MotorY.7 | length 431
  1-TOP w50: DrvY.21 2028,2367 MotorY.7@2377,2367
MOTOR_Z_A: DrvZ.1 DrvZ.2 MotorZ.1 | length 438.2
  1-TOP w50: DrvZ.1 2028.49,2738.49 2074,2784 2244,2784 2270,2758 MotorZ.1@2379,2758
MOTOR_Z_A\: DrvZ.3 DrvZ.4 MotorZ.2 | length 430.6
  1-TOP w15: MotorZ.2@2357,2889 MotorZ.2@2373,2905
  1-TOP w50: DrvZ.3 2031.49,2838.49 2082,2889 MotorZ.2@2357,2889
MOTOR_Z_B: DrvZ.22 DrvZ.23 MotorZ.8 | length 420.2
  1-TOP w50: DrvZ.23 2095.51,3838.49 2137,3797 MotorZ.8@2373,3797
MOTOR_Z_B\: DrvZ.20 DrvZ.21 MotorZ.7 | length 437.1
  1-TOP w50: DrvZ.21 2022.49,3686 2350,3686 MotorZ.7@2375,3661
NetARU_1: ARU.1 Rs_aru.2 | length 153.3
  4-BOT w20: ARU.1@605,208.09 605,316 Rs_aru.2@635,346
  4-BOT w50: ARU.1@542.91,222.09 ARU.1@545,220
NetCd24VCDE_2: Cd24VCDE.2 Dreverse.2 TR_5V.1 | length 748.4
  4-BOT w100: Cd24VCDE.2 Dreverse.2@705.89,2846.11 ; Dreverse.2 TR_5V.1@1079,2452.3
NetCpwr_2: Cpwr.2 Ppwr.2 Qpwr.1 RpwrPd.2 | length 735.6
  4-BOT w20: Ppwr.2@370,3355 370,3430 435,3495 605,3495 697.4,3402.6 Qpwr.1 857.4,3312.4 RpwrPd.2@870,3325
NetDcde_1: Dcde.1 Rcde.2 | length 150
  1-TOP w50: Rcde.2 1331,194.91 Dcde.1@1331,134
NetDpwr_1: Dpwr.1 Kpwr.8 Qpwr.3 | length 231.8
  4-BOT w20: Dpwr.1 560.91,3340 Kpwr.8@620,3340 ; Qpwr.3@620,3277 Kpwr.8
NetDpwr_2: Dpwr.2 Kpwr.1 Prelai.1 | length 248.3
  4-BOT w20: Prelai.1 471,3015 491,3035 Kpwr.1@610,3035
NetDrvX_7: DrvX.7 Pm1x.2 RpuM1x.1 | length 282.6
  1-TOP w20: Pm1x.2@1875,318 1970,413 DrvX.7
  4-BOT w20: Pm1x.2@1877,312 1877,175 RpuM1x.1@1880,172
NetDrvX_8: DrvX.8 Pm2x.2 RpuM2x.1 | length 809.3
  4-BOT w20: Pm2x.2@1878,420 1878,407 1911,374 2051,374 ; RpuM2x.1 1904.09,54 2012,54 2041,83 2041,363.83 DrvX.8
NetDrvX_9: DrvX.9 Pm3x.2 RpuM3x.1 | length 197.1
  4-BOT w20: 1875,607.91 1882.09,615 1882.09,517.09 1967.09,517.09 DrvX.9@1970,520
NetDrvX_17: DrvX.17 Rsync_x.2 | length 79.5
  4-BOT w20: Rsync_x.2 1905.09,917 1962,917 DrvX.17@1965,920
NetDrvX_18: DrvX.18 Flag_x.1 | length 80
  4-BOT w20: DrvX.18@2160,970 Flag_x.1@2240,970
NetDrvY_7: DrvY.7 Pm1y.2 RpuM1y.1 | length 640.2
  1-TOP w15: v1(1620,1868) 1883,1868 1925.89,1825.11 1925.89,1804.53 1926,1804.43 1926,1768 DrvY.7@1967,1727 ; Pm1y.2 1870,1598 1970,1698 DrvY.7 DrvY.7@1970,1728
NetDrvY_8: DrvY.8 Pm2y.2 RpuM2y.1 | length 610.5
  1-TOP w15: v1@1618,1749 1698,1749 1712,1735 1816,1735 Pm2y.2
  4-BOT w20: Pm2y.2@1867,1677 2009,1677 2059,1727 2059,1747 2087,1775 DrvY.8@2145,1775
  other v1: 1618,1750
NetDrvY_9: DrvY.9 Pm3y.2 RpuM3y.1 | length 193.3
  4-BOT w20: Pm3y.2@1865,1789.09 RpuM3y.1@1865,1882 ; Pm3y.2@1880,1790 1940,1790 1965,1815 DrvY.9@1965,1820
NetDrvY_17: DrvY.17 Rsync_y.2 | length 67.1
  4-BOT w20: Rsync_y.2@1902.09,2215 1955,2215 DrvY.17@1965,2225
NetDrvY_18: DrvY.18 Flag_y.1 | length 107.1
  4-BOT w20: DrvY.18@2155,2270 2230,2270 2235,2275 Flag_y.1@2235,2250
NetDrvZ_7: DrvZ.7 Pm1z.2 RpuM1z.1 | length 339
  1-TOP w20: Pm1z.2@1880,2849 1923.39,2892.39 1923.39,2991.88 DrvZ.7
  4-BOT w20: Pm1z.2@1875,2841 1875,2733 RpuM1z.1@1878,2730
NetDrvZ_8: DrvZ.8 Pm2z.2 RpuM2z.1 | length 839.9
  4-BOT w15: RpuM2z.1 1997,2628 2036,2667 2036,3005
  4-BOT w20: Pm2z.2@1875,2957 1907,2989 2019,2989 2075,3045 2075,3060 2105,3090 DrvZ.8@2140,3090
NetDrvZ_9: DrvZ.9 Pm3z.2 RpuM3z.1 | length 242.6
  4-BOT w20: Pm3z.2 1872,3072 1902,3072 DrvZ.9@1965,3135 ; Pm3z.2@1871,3071 1871,3158.91 RpuM3z.1@1887.09,3175 ; Pm3z.2@1880,3075 Pm3z.2@1887.09,3082.09
NetDrvZ_17: DrvZ.17 Rsync_z.2 | length 73.9
  4-BOT w20: Rsync_z.2@1901,3516 1925,3540 DrvZ.17@1965,3540
NetDrvZ_18: DrvZ.18 Flag_z.1 | length 88
  4-BOT w20: DrvZ.18 2234.66,3585.34 Flag_z.1@2235,3585
NetRelais_1: Relais.1 Rs_relai1.2 | length 65.9
  4-BOT w15: Rs_relai1.2 Relais.1@878,1272
NetRelais_2: Relais.2 Rs_relai2.2 | length 122.4
  4-BOT w20: Rs_relai2.2@864.09,1485 864.09,1477.91 882,1460 Relais.2
NetRelais_3: Relais.3 Rs_relai3.2 | length 110
  4-BOT w20: Rs_relai3.2@982,1160 Relais.3
NetRelais_4: Relais.4 Rs_relai4.2 | length 92.9
  4-BOT w20: Relais.4@987,1365 Rs_relai4.2@987,1457.91
POWER_ENABLE: Ppwr.1 U?.13 | length 3117.7
  2-SIGNAL w15: Ppwr.1@380,3265 481,3265 691,3055 691,2022 1213,1500 1213,1230 1115,1132 1115,763 1089,737 v1@1053,737
  4-BOT w15: U?.13 1007.58,746.42 1016,738 v1@1052,738
  other v1: 1054,727
POWER_ENABLE_PC: J_PC.8 U?.17 | length 707.7
  4-BOT w15: J_PC.8 369.48,1222.52 420,1172 420,992 640,772 U?.17@741.56,772
READ_5V: J_PC.15 U?.18 | length 1341.5
  4-BOT w15: J_PC.15@218,1821 270,1769 270,1292 284,1278 357,1278 451,1184 451,1009 664,796 751.83,796 U?.18
RESETX: Creset_x.2 DrvX.15 Rreset_x.1 | length 150.3
  4-BOT w20: Rreset_x.1 1892.09,822.91 2012.09,822.91 Creset_x.2@2025,810
RESETY: Creset_y.2 DrvY.15 Rreset_y.1 | length 263.4
  4-BOT w20: Rreset_y.1@1895,2120 1991.54,2120 Creset_y.2 2009.54,2102 1912,2102 Rreset_y.1@1905,2095
RESETZ: Creset_z.2 DrvZ.15 Rreset_z.1 | length 130.8
  4-BOT w20: Rreset_z.1 1915.09,3423 2019,3423 Creset_z.2@2020,3422
SLEEP: Csleep_x.1 Csleep_y.1 Csleep_z.1 DrvX.13 DrvY.13 DrvZ.13 Qsleep.1 Rsleep+.1 Rsleep-.3 | length 3725.4
  4-BOT w15: Qsleep.1@1507.91,797.91 Rsleep+.1
  4-BOT w20: Rsleep+.1 1661.91,797.91 1705,841 1705,3103 1935,3333 DrvZ.13@1976,3333 ; Rsleep+.1@1601,795 1703,693 1943.39,693 DrvX.13 ; 1706,1953 1902,1953 DrvY.13@1964,2015 ; DrvY.13@1975,2025 1981.54,2025 Csleep_y.1 ; DrvZ.13@1975,3330 2000,3305 Csleep_z.1 ; DrvX.13@1980,710 1990,700 Csleep_x.1
  other v1: 1603,829
V_MOTOR: DrvX.11 DrvY.11 DrvZ.11 Kpwr.4 Kpwr.5 MotorX.3 MotorX.6 MotorY.3 MotorY.6 MotorZ.3 MotorZ.6 Sensors.1 | length 8281.6
  1-TOP w30: DrvX.11 2231,620 MotorX.3@2380,471 ; DrvY.11 2226,1925 MotorY.3@2387,1764
  1-TOP w50: Sensors.1@208,3514 1434.98,3514 Kpwr.5 ; Kpwr.4@1616,3037 1616,3333 1875,3592 1875,3862 1913,3900 2422,3900 2470,3852 2470,3565 ; Kpwr.5@1620,3332 1714,3238 1934.02,3238 1934.51,3238.49 DrvZ.11 ; MotorX.6 2458,895 ; MotorY.6 2454,2215 2456,2213 ; MotorY.3@2386,1759 2386,1761 2470,1845 ; MotorX.3@2393,458 2470,535 2470,1845 ; MotorZ.3@2402,3055 2402,3059 2470,3127 ; MotorZ.6@2403,3498 2470,3565 ; 2470,1845 2470,3127 ; 2470,3127 2470,3565
V_PWR: Dreverse.1 Dreverse.3 Kpwr.3 Kpwr.6 PWR.1 | length 1269.5
  4-BOT w100: PWR.1@1065.5,3701.5 1399,3368 1399,3027 1182,2810 Dreverse.3@1182,2660
pads on no net: DrvX.5 DrvX.6 DrvX.19 DrvY.5 DrvY.6 DrvY.19 DrvZ.5 DrvZ.6 DrvZ.19 J_PC.FIX1 J_PC.FIX2 Kpwr.2 Kpwr.7 Rsleep-.1 TR_5V.4 TR_5V.6

## Polygon pours and split planes (outlines as drawn)
GND on 1-TOP "1-GND" (solid, pour order 10): 0,0 0,3950 2520,3950 2520,0
GND on 2-SIGNAL "2-GND" (solid, pour order 12): 0,0 0,3950 2520,3950 2520,0
GND on 3-GND "3-GND" (solid, pour order 14): 0,0 0,3950 2520,3950 2520,0
GND_PWR on 3-GND "3-GND_PWR" (solid, pour order 6): 1355,3799 1361,3694 1361,2390 1349,2378 555,2378 311,2622.95 311,2723 974,3799
GND on 4-BOT "4-GND" (solid, pour order 16): 0,0 0,3950 2520,3950 2520,0

## Keep-outs
Keep-Out Layer:
  the board outline again, w25

## Silkscreen, mask and mechanical layers (free items; w line width, h text height)
Top Overlay:
  text "B" at 2292,3793 h40 r90
  text "|" at 2243,3682 h40 r180
  text "B" at 2299,3649 h40 r90
  text "GND" at 1271,3544 h60
  text "A" at 530,3439 h60
  text "Vmot" at 2286,3439 h40 r90
  text "4001" at 462,3291 h40 r270
  text "GND" at 2312,3235 h40 r90
  text "PowerEn" at 309,3191 h40 r90
  text "Pm3z" at 1758,3140 h40
  text "Vmot" at 2287,3000 h40 r90
  text "Relai" at 308,2983 h40 r90
  text "|" at 2235,2931 h40 r180
  text "A" at 2291,2898 h40 r90
  text "K" at 439,2891 h60
  text "+" at 293,2877 h40
  text "A" at 2291,2744 h40 r90
  text "Pm1z" at 1784,2742 h40
  text "SLA7078" at 2074,2728 h40 r90
  text "B" at 2298,2515 h40 r90
  text "|" at 2249,2404 h40 r180
  text "B" at 2305,2371 h40 r90
  text "Vmot" at 2292,2161 h40 r90
  text "GND" at 2318,1957 h40 r90
  text "Vmot" at 2293,1722 h40 r90
  text "|" at 2241,1653 h40 r180
  text "A" at 2297,1620 h40 r90
  text "A" at 2297,1466 h40 r90
  text "SLA7078" at 2071,1369 h40 r90
  text "B" at 2298,1176 h40 r90
  text "|" at 2249,1065 h40 r180
  text "B" at 2305,1032 h40 r90
  text "CNC" at 482,923 h150
  text "Vmot" at 2292,822 h40 r90
  text "2015" at 481,788 h150
  text "GND" at 2318,618 h40 r90
  text "Robot ESEO" at 436,601 h150
  text "Ventilos" at 918,526 h40
  text "Dorian" at 446,477 h150
  text "Vmot" at 2293,383 h40 r90
  text "+5V" at 929,344 h40 r90
  text "|" at 2241,314 h40 r180
  text "1k" at 1314,313 h40 r270
  text "A" at 2297,281 h40 r90
  text "A" at 2297,127 h40 r90
  text "GND" at 931,94 h40 r90
  text "SLA7078" at 2080,72 h40 r90
Bottom Overlay:
  text "STRAP" at 1297,3845 h40
  text "FlagZ" at 2268,3811 h40 r90
  text "10k" at 1742,3482 h40
  text "10n" at 2104,3468 h40
  text "10k" at 1745,3388 h40
  text "100n" at 769,3356 h40 r270
  text "MOSN" at 571,3330 h40 r90
  text "1k" at 928,3257 h40 r270
  text "10n" at 2022,3254 h40 r180
  text "10k" at 1883,3237 h40 r315
  text "10k" at 1710,2706 h40
  text "10k" at 1708,2599 h40
  text "FlagY" at 2273,2510 h40 r90
  text "VS-42CTQ030SPBF" at 1207,2484 h40
  text "10k" at 1718,2162 h40
  text "10n" at 2035,2151 h40 r270
  text "10k" at 1716,2068 h40
  text "10k" at 1781,1959 h40
  text "10k" at 1462,1838 h40
  text "10n" at 2036,1767 h40 r270
  text "10k" at 1463,1704 h40
  text "100" at 1095,1531 h40
  text "100" at 874,1529 h40
  text "100" at 770,1324 h40
  text "FlagX" at 2271,1204 h40 r90
  text "100" at 787,1125 h40
  text "ST1284-01A8" at 698,1090 h40 r90
  text "10k" at 1904,988 h40
  text "MOSP" at 1529,921 h40
  text "10k" at 1738,887 h40 r90
  text "10n" at 2097,857 h40
  text "10k" at 1645,813 h40 r270
  text "10k" at 1783,715 h40 r90
  text "10n" at 2011,647 h40 r180
  text "1k" at 1470,623 h40 r180
  text "100" at 720,416 h40
  text "100n" at 943,403 h40
  text "10k" at 1866,219 h40

## Text inside footprints (layer, text, board x,y; h text height)
CdPerm: Top Overlay "+" at 1744.76,1345.2 h45 r180
Dreverse: Bottom Overlay "3" at 1241,2589 h40 r90; Bottom Overlay "1" at 1245,2917 h40 r90
J_PC: Top Overlay "14" at 163.7,1886.34 h59.06 r90; Top Overlay "25" at 163.7,685.55 h59.06 r90; Top Overlay "1" at 356.61,2063.5 h59.06 r90; Top Overlay "13" at 356.61,524.13 h59.06 r90
Rsleep-: Top Overlay "+" at 1427.43,879.61 h60 r90
TR_5V: Top Overlay "trim" at 1146,1938 h60 r270; Top Overlay "ON/OFF" at 1546,2338 h60 r270; Top Overlay "THN20" at 721,2488 h60 r270; Top Overlay "-Vin" at 1246,2358 h60 r270; Top Overlay "+Vin" at 1036,2358 h60 r270; Top Overlay "-Vout" at 1471,1838 h60 r270; Top Overlay "+Vout" at 846,1838 h60 r270